# EAGLE board rpi-header-can-pwr_v2 (EAGLE 7.6.0)
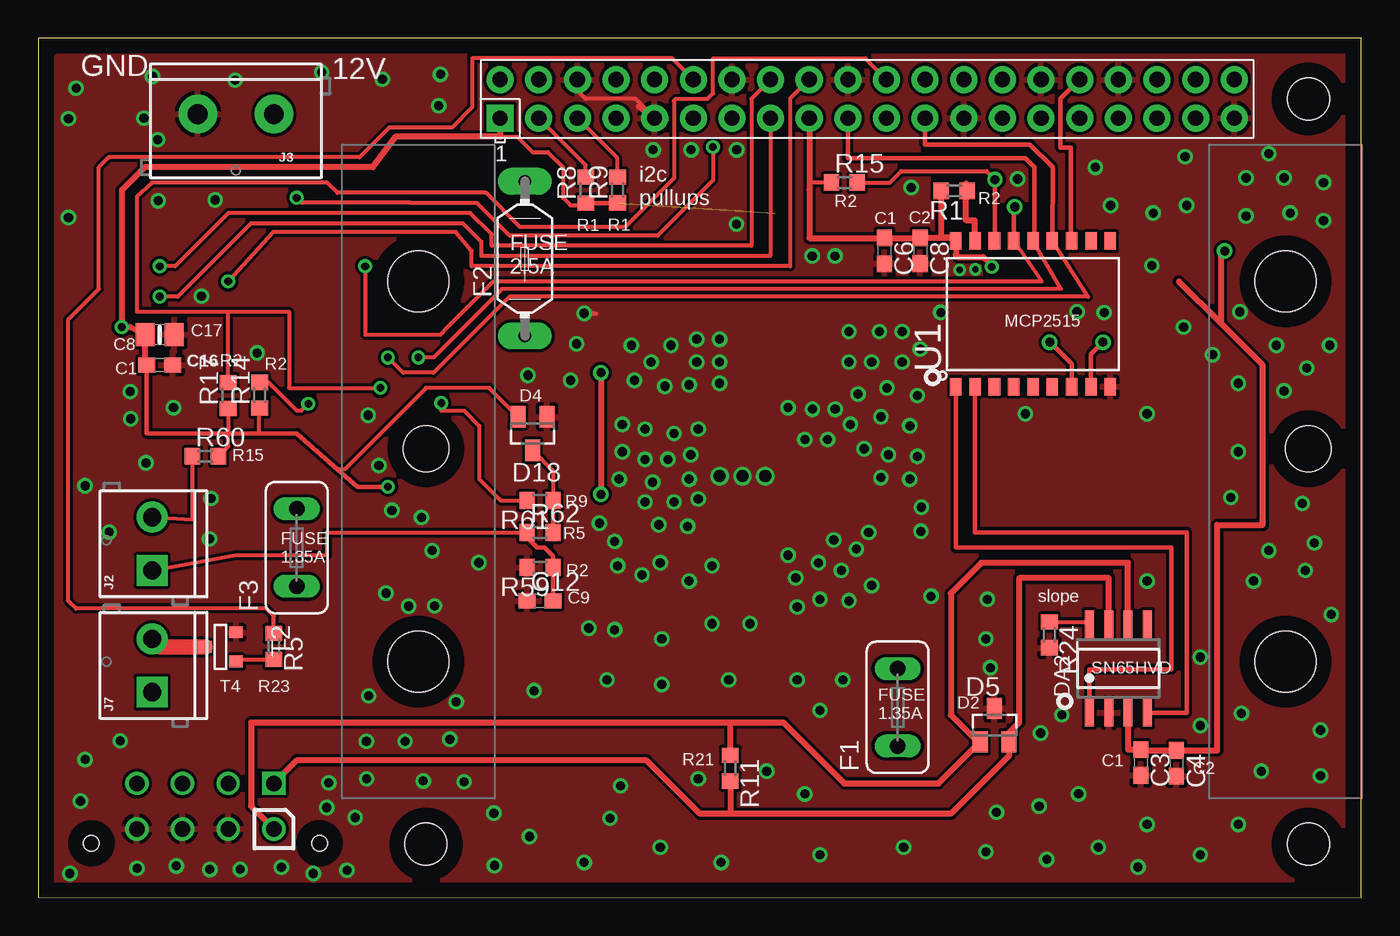
[diagram p0: board, top side]
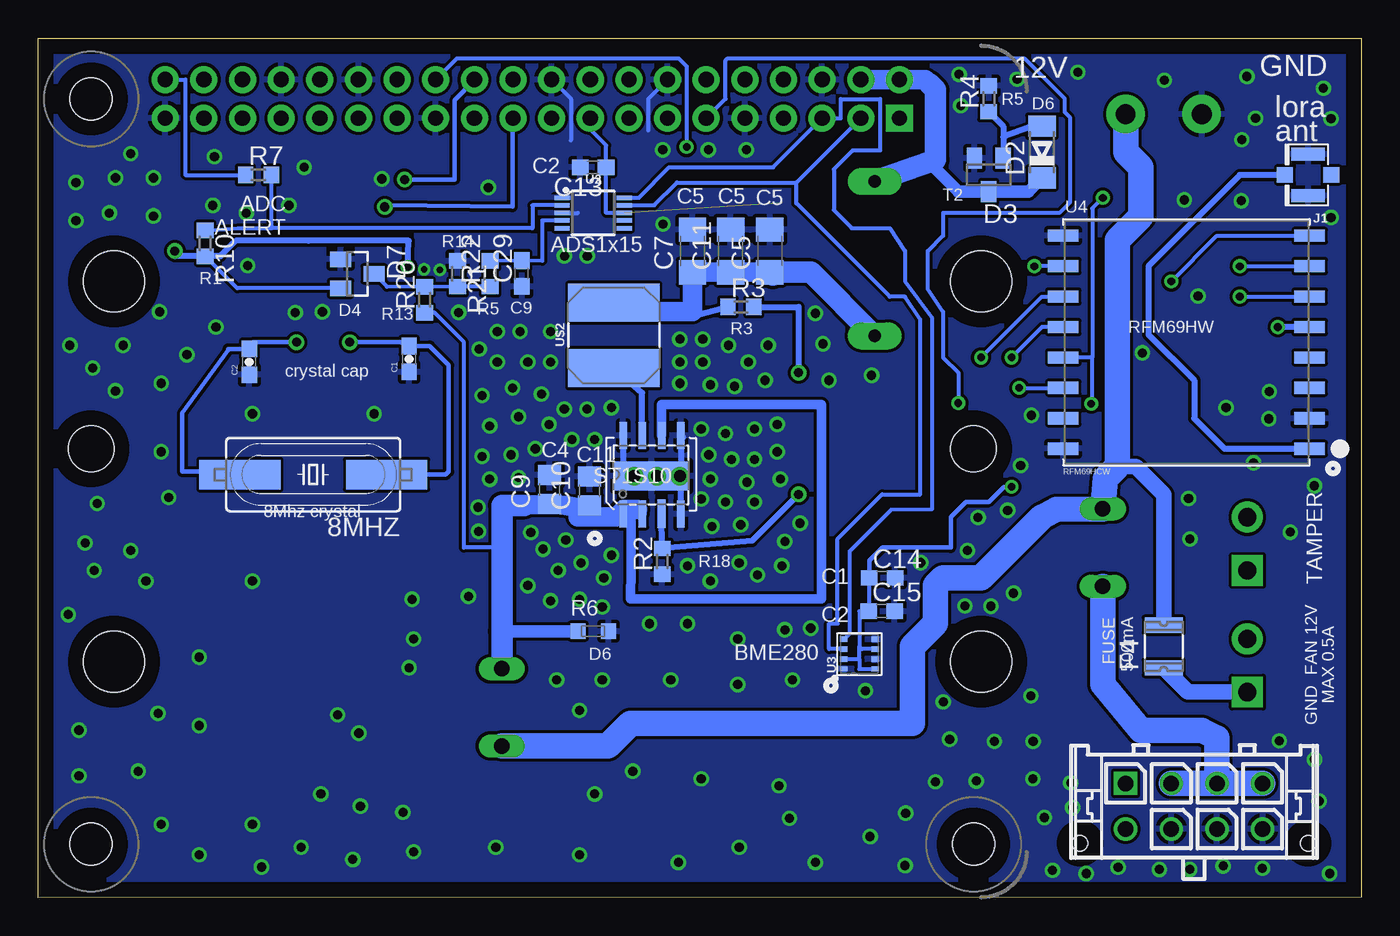
[diagram p1: board, bottom side, seen from below]

Size 86.99 x 56.52 mm. Coordinates in mm from the lower left corner, seen from the top.
Outline: 0,0.02 86.99,0 86.99,56.52 0,56.52 0,0.02
Copper layers (1*16): Top 0.035mm / dielectric 1.5mm / Bottom 0.035mm
Design rules "default *": minimum track width 10mil, minimum drill 0.4mm, track to track 8mil, track to pad 8mil, pad to pad 8mil, via to via 8mil, smd to smd 8mil, copper to edge 40mil, drill to drill 8mil, minimum pad ring 10mil, minimum via ring 8mil, stop-mask expansion 4mil, vias tented up to drill 0mil, thermal gap 10mil
Holes 3 mm at 83.5,29.52 25.5,29.52

## Footprints (pad centres in the part's own frame; a part is rotated, then mirrored left to right if it is on the bottom)
HC49UP = smd 5.334 x 1.93: 1 -4.826,0; 2 4.826,0
0603-CAP = smd 1.1 x 1: 1 -0.85,0; 2 0.85,0
C0603 = smd 1.1 x 1: 1 -0.85,0; 2 0.85,0
C1206 = smd 1.6 x 1.8: 1 -1.4,0; 2 1.4,0
C0805 = smd 1.3 x 1.5: 1 -0.95,0; 2 0.95,0
0603-NO = smd 1.1 x 1: 1 -0.85,0; 2 0.85,0
0805-NO = smd 1.24 x 1.5: 1 -0.95,0; 2 0.95,0
SOD80C = smd 1.4 x 1.8: A 1.7,0; C -1.7,0
SOT23 = smd 1 x 1.4: 1 -0.95,-1.1; 2 0.95,-1.1; 3 0,1.1
SO08 = smd 0.6 x 1.8: 1 -1.905,-2.917; 2 -0.635,-2.917; 3 0.635,-2.917; 4 1.905,-2.917; 5 1.905,2.917; 6 0.635,2.917; 7 -0.635,2.917; 8 -1.905,2.917
TE5 = drill 1.016 long: 1 -2.54,0; 2 2.54,0
LITTLEFUSE = drill 0.813 pad 1.778 long: 1 -5.08,0; 2 5.08,0
1210L = smd 1 x 2.5: 1 -1.4,0; 2 1.4,0
U.FL = smd 2.2 x 0.85: P$1 0,1.375; P$2 0,-1.375 | smd 1.05 x 1: P$3 1.525,0; P$4 -1.525,0
SCREWTERMINAL-3.5MM-2 = drill 1.2 pad 2.032 square: 1 0,0 | drill 1.2 pad 2.032: 2 3.5,0
SCREWTERMINAL-5MM-2 = drill 1.3 pad 2.54: 1 0,0; 2 5,0
R0603 = smd 1 x 1.1: 1 -0.85,0; 2 0.85,0
CT/CN0603 = smd 1 x 1: 1 -1,0; 2 1,0
SOT-23 = smd 0.787 x 0.889: 1 0.025,-1.016; 2 -0.94,1.016; 3 0.991,1.016
SO-18W = smd 0.762 x 1.143: 1 -5.08,-4.788; 2 -3.81,-4.788; 3 -2.54,-4.788; 4 -1.27,-4.788; 5 0,-4.788; 6 1.27,-4.788; 7 2.54,-4.788; 8 3.81,-4.788; 9 5.08,-4.788; 10 5.08,4.788; 11 3.81,4.788; 12 2.54,4.788; 13 1.27,4.788; 14 0,4.788; 15 -1.27,4.788; 16 -2.54,4.788; 17 -3.81,4.788; 18 -5.08,4.788
MSOP10 = smd 0.3 x 1: 1 -1,-2.05; 2 -0.5,-2.05; 3 0,-2.05; 4 0.5,-2.05; 5 1,-2.05; 6 1,2.05; 7 0.5,2.05; 8 0,2.05; 9 -0.5,2.05; 10 -1,2.05
LGA-8-2.5X2.5 = smd 0.35 x 0.5: 1 -0.975,1.025; 2 -0.325,1.025; 3 0.325,1.025; 4 0.975,1.025; 5 0.975,-1.025; 6 0.325,-1.025; 7 -0.325,-1.025; 8 -0.975,-1.025
RFMHCW_SMT = smd 2 x 0.8: 1P 8.1,-7; 2P 8.1,-5; 3P 8.1,-3; 4P 8.1,-1; 5P 8.1,1; 6P 8.1,3; 7P 8.1,5; 8P 8.1,7; 9P -8.1,7; 10P -8.1,5; 11P -8.1,3; 12P -8.1,1; 13P -8.1,-1; 14P -8.1,-3; 15P -8.1,-5; 16P -8.1,-7
POWERSO-8 = smd 0.5 x 1.77: 1 -1.879,-2.5; 2 -0.625,-2.5; 4 1.913,-2.5; 5 1.918,2.65; 6 0.649,2.65; 7 -0.626,2.65; 8 -1.879,2.65 | smd 0.5 x 1.87: 3 0.644,-2.5 | smd 4.953 x 1.905: 9 0,0
0504 = smd 2.5 x 6: 1 -2.175,0; 2 2.125,0
C45-DIN-MOUNT-2-HOLE = hole 4: 0,12.5; 0,-12.5
RASPI_BOARD_B+_EDGES_3DRILL = drill 1 pad 1.778 square: 1 8.37,51.23 | drill 1 pad 1.778: 2 8.37,53.77; 3 10.91,51.23; 4 10.91,53.77; 5 13.45,51.23; 6 13.45,53.77; 7 15.99,51.23; 8 15.99,53.77; 9 18.53,51.23; 10 18.53,53.77; 11 21.07,51.23; 12 21.07,53.77; 13 23.61,51.23; 14 23.61,53.77; 15 26.15,51.23; 16 26.15,53.77; 17 28.69,51.23; 18 28.69,53.77; 19 31.23,51.23; 20 31.23,53.77; 21 33.77,51.23; 22 33.77,53.77; 23 36.31,51.23; 24 36.31,53.77; 25 38.85,51.23; 26 38.85,53.77; 27 41.39,51.23; 28 41.39,53.77; 29 43.93,51.23; 30 43.93,53.77; 31 46.47,51.23; 32 46.47,53.77; 33 49.01,51.23; 34 49.01,53.77; 35 51.55,51.23; 36 51.55,53.77; 37 54.09,51.23; 38 54.09,53.77; 39 56.63,51.23; 40 56.63,53.77 | hole 2.75: 3.5,3.5; 61.5,3.5; 61.5,52.5
43045-0812 = drill 1.02 square: P$1 4.5,0 | drill 1.02: P$2 1.5,0; P$3 -1.5,0; P$4 -4.5,0; P$5 4.5,3; P$6 1.5,3; P$7 -1.5,3; P$8 -4.5,3 | hole 1.02: 7.5,3.94; -7.5,3.94

## Placement (x,y rotation side)
8MHZ  [HC49UP]  68.9,27.82 180 bottom
C1  22pF  [0603-CAP]  62.6,35.42 90 bottom
C2  22pF  [0603-CAP]  73.1,35.23 90 bottom
C3  100n  [C0603]  72.48,8.89 270 top
C4  1u  [C0603]  74.83,8.84 270 top
C5  22uF  [C1206]  38.89,42.52 90 bottom
C6  1u  [C0603]  55.63,42.53 270 top
C7  22uF  [C1206]  43.97,42.52 90 bottom
C8  100n  [C0603]  57.98,42.54 270 top
C9  4,7u  [C0805]  53.37,26.84 90 bottom
C10  100n  [C0805]  50.73,26.74 90 bottom
C11  22uF  [C1206]  41.47,42.52 90 bottom
C12  10nF  [C0603]  33,19.52 0 top
C13  100n  [C0603]  50.5,48.02 180 bottom
C14  1u  [C0603]  31.5,21.02 0 bottom
C15  100n  [C0603]  31.54,18.84 0 bottom
C16  0.1uF  [0603-NO]  8,35.02 0 top
C17  10uF  [0805-NO]  8,37.02 0 top
C29  10nF  [C0603]  55.19,41.04 90 bottom
D2  [SOD80C]  21,49.02 90 bottom
D3  BC846  [SOT23]  24.5,47.52 180 bottom
D5  PESD1CAN  [SOT23]  62.87,11.35 0 top
D7  BAS70-04  [SOT23]  66,41.02 270 bottom
D18  BAS70-04  [SOT23]  32.5,30.52 180 top
DA2  SN65HVD232  [SO08]  71.01,15.08 0 top
F1  FUSETE5  [TE5]  56.5,12.52 90 top
F2  FUSELITTLEFUSE  [LITTLEFUSE]  32,42.02 90 top
F3  FUSETE5  [TE5]  17,23.02 90 top
F4  1210L010  [1210L]  13,16.52 90 bottom
J1  U.FL  [U.FL]  3.5,47.52 180 bottom
J2  [SCREWTERMINAL-3.5MM-2]  7.5,21.52 90 top
J3  [SCREWTERMINAL-5MM-2]  15.5,51.52 180 top
J7  [SCREWTERMINAL-3.5MM-2]  7.5,13.52 90 top
R1  10k  [R0603]  60.22,46.47 180 top
R2  19,1K  [R0603]  45.96,22.11 90 bottom
R3  100k  [R0603]  40.8,38.84 0 bottom
R4  1k  [R0603]  24.5,52.52 90 bottom
R5  500  [R0603]  15.5,16.52 270 top
R6  VARISTORCN0603  [CT/CN0603]  50.5,17.52 0 bottom
R7  0  [R0603]  72.5,47.52 0 bottom
R8  4.7K  [R0603]  36,46.52 90 top
R9  4.7K  [R0603]  38.09,46.53 90 top
R10  4.7K  [R0603]  76,43.02 270 bottom
R11  120  [R0603]  45.5,8.52 270 top
R14  10k  [R0603]  14.57,33.04 90 top
R15  10k  [R0603]  53,47.02 0 top
R17  10k  [R0603]  12.5,33.02 90 top
R20  68k  [R0603]  61.58,39.31 90 bottom
R21  20k  [R0603]  59.42,41.02 270 bottom
R22  1k  [R0603]  57.28,41.02 90 bottom
R24  0  [R0603]  66.47,17.29 270 top
R59  10k  [R0603]  33,21.72 180 top
R60  100  [R0603]  11,29.02 0 top
R61  100  [R0603]  33,26.12 180 top
R62  1k  [R0603]  33,24.02 0 top
T2  [SOT-23]  12,16.52 270 top
U1  MCP2515  [SO-18W]  65.4,38.39 0 top
U2  ADS1015  [MSOP10]  50.5,45.02 270 bottom
U3  BME280  [LGA-8-2.5X2.5]  33,16.02 90 bottom
U4  RFM69HCW  [RFMHCW_SMT]  11.5,36.52 0 bottom
U$1  ST1S10  [POWERSO-8]  46.65,27.74 0 bottom
U$2  4,7uH  [0504]  49.15,37 90 bottom
U$3  [C45-DIN-MOUNT-2-HOLE]  82,28.02 0 bottom
U$4  [C45-DIN-MOUNT-2-HOLE]  25,28.02 0 bottom
X2  RASPI_BOARD_B+#_E3  [RASPI_BOARD_B+_EDGES_3DRILL]  22,0.02 0 top
X4  [43045-0812]  11,7.52 180 bottom

## Library data of the parts
8MHZ = crystal; OC_FARNELL: unknown; OC_NEWARK: unknown
C1 C2 = SparkFun-Capacitors; PROD_ID: CAP-07876
C3-C11 C13-C15 R1-R5 R11 R14 R15 R17 R20-R22 R24 R59-R62 = rcl
C12 C29 = eagle-ltspice; SPICEMODEL: NONE; SPICEPREFIX: C
C16 C17 U4 = microbuilder
D2 D5 D7 D18 = diode
D3 = transistor
DA2 = transceiver
F1-F3 = fuse; OC_FARNELL: unknown; OC_NEWARK: unknown
F4 = polyfuse-smd_10; MF: Littelfuse; MPN: 1210L010; OC_FARNELL: 1822206; OC_NEWARK: 18M4781
J1 = SparkFun-Connectors; PROD_ID: CONN-09193; SF_ID: WRL-09144
J2 J7 = SparkFun-Connectors; PROD_ID: CONN-08399
J3 = SparkFun-Connectors; SF_SKU: PRT-08432
R6 = varistor
R7-R10 = resistor
T2 = zetex; MPN: DSS20201L-7; OC_FARNELL: 1710688; OC_NEWARK: 25R4555
U1 = SparkFun-DigitalIC; PROD_ID: IC-09906
U2 = SparkFun-IC-Conversion; PROD_ID: IC-12270
U3 = SparkFun-Sensors; PROD_ID: IC-13090
U$1 U$2 = lcd
U$3 U$4 = mounting
X2 = raspberrypi_bastelstube_v13
X4 = con-molex-micro-fit-3_0

## Nets
5V: D2.C D3.3 F2.2 X2.2 X2.4
12V_REFERENCE4: D7.3 R20.2 R21.2 R22.1
+3V3: C3.1 C4.1 C6.1 C8.1 C13.1 C14.1 C15.1 C16.1 C17.1 D7.2 D18.2 DA2.3 R1.2 R8.1 R9.1 R10.2 R14.1 R15.1 R17.1 R60.2 U1.18 U2.8 U3.2 U3.6 U3.8 U4.5P X2.1 X2.17
+12V: C9.1 C10.1 F1.2 R6.1 R20.1 U$1.1 U$1.2 U$1.6
ADC_ALERT: R7.1 X2.40
ADC_INPUT_1: C29.2 R22.2 U2.4
ASDASD: D18.3 R61.1 R62.2
CAN_CS: R15.2 U1.16 X2.24
CAN_H: D5.2 DA2.7 R11.2 X4.P$1
CAN_INT: U1.12 X2.32
CAN_L: D5.1 DA2.6 R11.1 X4.P$5
CAN_PWR: F3.1 X4.P$2 X4.P$3 X4.P$4
CAN_RX: DA2.4 U1.2
CAN_TX: DA2.1 U1.1
FAN_PWM: R5.1 X2.12
GND: C1.1 C2.1 C3.2 C4.2 C5.2 C6.2 C7.2 C8.2 C9.2 C10.2 C11.2 C12.1 C13.2 C14.2 C15.2 C16.2 C17.2 C29.1 D3.2 D5.3 D7.1 D18.1 DA2.2 J1.P$1 J1.P$2 J3.2 R2.1 R4.2 R6.2 R21.1 R24.2 R59.2 T2.2 U1.9 U2.1 U2.3 U3.1 U3.5 U3.7 U4.2P U4.9P U4.16P U$1.4 U$1.5 U$1.8 U$1.9 X2.6 X2.9 X2.14 X2.20 X2.25 X2.30 X2.34 X2.39 X4.P$6 X4.P$7 X4.P$8
I2C_SCL: R9.2 U2.10 U3.4 X2.5
I2C_SDA: R8.2 U2.9 U3.3 X2.3
LORA_CS: R14.2 U4.13P X2.26
LORA_DIO0: U4.6P X2.15
LORA_DIO1: U4.7P X2.16
LORA_DIO2: U4.8P X2.18
LORA_RST: R17.2 U4.14P X2.22
MISO: U1.15 U4.10P X2.21
MOSI: U1.14 U4.11P X2.19
N$1: R2.2 R3.2 U$1.3
N$2: 8MHZ.2 C2.2 U1.8
N$3: 8MHZ.1 C1.2 U1.7
N$4: D2.A D3.1 R4.1
N$5: J1.P$3 U4.1P
N$7: U$1.7 U$2.1
N$8: C5.1 C7.1 C11.1 F2.1 R3.1 U$2.2
N$9: R7.2 R10.1 U2.2
N$10: J2.2 R60.1
N$11: C12.2 J2.1 R59.1 R62.1
N$12: R5.2 T2.3
N$13: F4.1 J7.1
N$14: J7.2 T2.1
N$17: DA2.8 R24.1
PRE_FUSE_12V: F1.1 F3.2 F4.2 J3.1
RS: R1.1 U1.17
SCK: U1.13 U4.12P X2.23
TAMPER: R61.2 X2.11

## Tracks (layer width: path | path; a pad name or v marks a point on that pad's centre or on a via)
5V
  Bottom 0.61: 24.6,46.42 D3.3
  Bottom 0.813: D3.3 21.9,46.42 D2.C | 24.6,46.42 26.5,46.42 28.44,48.36
  Bottom 1.27: 28.4,53.52 28.67,53.79 X2.2 X2.4
  Bottom 1.422: 28.4,53.52 28,53.12 28,48.52 28.44,48.36 F2.2
12V_REFERENCE4
  Bottom 0.254: R22.1 R21.2 R20.2 64.05,40.17 D7.3
+3V3  (via drill 0.5, 0.6)  (1 unrouted)
  Top 0.254: R15.1 50.7,47.02 50.7,46.52 | R14.1 14.5,32.12 14.5,30.52 | R17.1 12.5,30.52 12.5,29.67 R60.2 | 30.37,50.02 31.5,50.02 32.5,49.02 33.5,49.02 34.5,48.02 34.5,46.02 35,45.52 35.85,45.52 R8.1 | D18.2 29.65,33.52 25.5,33.52 20.15,28.17 19.69,28.17 | 62.5,41.52 62.55,41.47 v62.69,41.47
  Top 0.305: R8.1 R9.1 | C16.1 7.15,30.52 12.5,30.52 14.5,30.52 17,30.52 19.69,28.17 21,27.02 v23,27.02
  Top 0.406: 60.11,43.39 C8.1 C6.1 | 60.11,43.39 U1.18 60.32,42.27 60.46,42.13 62.11,42.13 62.5,41.74 62.5,41.52 | C6.1 56,43.02 | 60.11,43.39 59.37,43.43 R1.2 | X2.17 50.7,46.52 50.7,43.38 C6.1 | DA2.3 71.64,9.74 C3.1 72.48,9.69 C4.1 77.5,9.69 77.5,24.52 80.5,24.52 80.5,35.02 77.75,37.77 | 77.75,37.77 75,40.52 | v78,42.52 77.75,42.52 77.75,37.77 | X2.1 30.37,50.02 23.5,50.02 22,48.02 7,48.02 5.5,46.52 v5.5,37.52 6.05,37.52 C17.1 7.05,35.02 C16.1
  Bottom 0.254: U2.8 49.65,45.02 C13.1 49.65,49.47 50.7,50.52 X2.17 | U3.2 33,15.7 | 33,15.7 33,16.52 | 33,15.7 33,15.04 U3.8 | U3.6 32.83,16.34 arc90 33,16.52 | 33,16.52 33,18.84 C15.1 32.35,18.84 C14.1 | D7.2 73.9,40.07 R10.2
  Bottom 0.305: C14.1 32.35,22.17 31.5,23.02 27,23.02 27,25.02 26,26.02 24.5,26.02 23.5,27.02 v23,27.02
  Bottom 0.406: v78,42.52 78,42.17 R10.2 75.01,42.17 73.99,43.19 69.23,43.19 69.22,43.2 62.62,43.2 v62.69,41.47 | U4.5P v5.5,37.52
+12V
  Bottom 0.254: 56.5,23.02 59,23.02 59,36.52 60.94,38.46 R20.1
  Bottom 0.406: 52.27,25.79 C10.1 | 51.73,25.49 U$1.1 48.5,25.52
  Bottom 0.61: U$1.6 46,32.42 35.5,32.42 35.5,19.66 48.05,19.66 48,21.62 48,25.52 U$1.2
  Bottom 0.813: R6.1 56.5,17.52
  Bottom 1.27: 55.34,25.8 54.84,25.82 C9.1 52.27,25.79 51,25.52 51.5,25.02 49,25.02 48.5,25.52 48,25.52 47.6,25.52
  Bottom 1.422: 55,25.8 55.34,25.8 56.5,25.8 56.5,23.02 56.5,17.52 F1.2
ADC_ALERT
  Bottom 0.254: X2.40 77.31,53.79 77.31,47.52 R7.1
ADC_INPUT_1
  Bottom 0.254: U2.4 53.85,44.52 53.85,41.87 C29.2 R22.2
ASDASD
  Top 0.254: D18.3 33.85,28.07 R61.1
  Top 0.305: R61.1 R62.2
CAN_CS  (via drill 0.6)
  Top 0.254: R15.2 56,47.02 56.75,47.77 62.35,47.77 v62.9,47.22
  Top 0.305: U1.16 62.9,43.18 v62.9,47.22
  Bottom 0.305: X2.24 59.6,52.42 59.6,47.22 v62.9,47.22
CAN_H
  Top 0.406: DA2.7 70.38,21.02 64.5,21.02 64.5,11.52 63.82,10.84 D5.2 63.82,9.34 60,5.52 45.5,5.52 | 45.5,5.52 43.5,5.52 40,9.02 17,9.02 X4.P$1 | R11.2 45.5,5.52
CAN_INT
  Top 0.305: U1.12 67.9,43.18 67.9,49.32 67.2,49.32 67.2,52.52 X2.32
CAN_L
  Top 0.406: DA2.6 71.64,22.02 62,22.02 60,20.02 60,12.02 61.77,10.25 D5.1 59.19,7.52 53,7.52 49,11.52 45.5,11.52 | 45.5,11.52 14,11.52 14,6.02 X4.P$5 | R11.1 45.5,11.52
CAN_PWR
  Bottom 1.676: X4.P$4 X4.P$3 | X4.P$3 10,7.52 | 10,7.52 X4.P$2 | 9.5,8.02 10,7.52 | F3.1 17,14.02 14.5,11.02 10.5,11.02 9.5,10.52 X4.P$3
CAN_RX
  Top 0.305: DA2.4 75.5,12.16 75.5,24.02 61.59,24.02 U1.2
CAN_TX
  Top 0.305: U1.1 60.32,23.02 74.5,23.02 74.5,15.02 69.11,15.02 DA2.1
  Top 0.406: 69.11,13.12 DA2.1
FAN_PWM
  Top 0.254: X2.12 41.68,55.18 28.54,55.18 28.54,51.98 27.2,50.64 23.09,50.64 21.13,48.68 4.66,48.68 4,48.02 4,40.02 2,38.02 2,19.52 2.5,19.02 15,19.02 15.5,18.52 R5.1
GND  (via drill 0.4, 0.6, 0.8)
  Top 0.254: X2.9 39.26,52.52 36,52.52 35.45,53.07 X2.6
  Top 0.305: v35.9,38.42 36.67,38.42
  Top 0.406: X2.9 39.5,52.02
  Bottom 0.254: U2.3 51.5,45.02 | U2.1 52,46.02 | X2.20 51.96,52.52 51.96,49.8 | X2.14 46.89,52.51 46.89,50.45
  Bottom 0.406: U$1.8 48.53,27.74 U$1.9 | U$1.9 44.73,27.74 U$1.5 44.59,30.28 | U$1.4 44.74,27.74 U$1.9
  other vias: 26.45,54.13 29.96,5.56 21.7,31.72 2,44.72 80.9,48.92 11.27,23.59 75.5,45.52 84.5,47.02 70.5,45.52 69.5,48.02 83.9,23.32 45.91,44.28 41,17.02 39.7,21.22 36.2,17.72 84.3,11.02 32.3,4.02 26.07,19.18 37.6,5.22 39.9,26.02 35,34.02 40.43,49.17 64.39,47.26 27.07,10.42 54.8,20.52 26.34,52.07 28,7.62 25.9,22.82 37.9,23.42 40.4,27.32 21.6,7.82 21.58,10.28 42.8,33.72 8.9,32.22 18.64,54.27 7.53,53.99 46.3,27.72 44.8,27.72 42.9,29.12 51.9,30.12 49.3,32.22 44.8,33.82 41.2,33.62 39.2,34.02 47.8,27.72 42.7,24.42 43.4,26.22 6.09,31.49 41.6,36.32 39,36.32 84.3,8.02 69.7,3.32 58.7,19.82 41.4,28.82 39.9,30.82 43.4,30.82 38.4,31.12 38.2,27.52 40.8,24.52 36.9,24.62 38.1,21.82 40.9,22.02 42.8,20.82 75.4,48.72 62.4,19.62 57.99,36.07 41.8,26.02 42.8,27.52 41.8,30.52 49.3,22.52 49.8,21.02 51.3,22.02 52.3,23.52 52.8,21.52 53.8,22.92 50.4,30.12 50.9,32.12 52.4,32.12 53.4,31.12 53.9,33.12 55.4,31.62 55.9,29.12 55.4,27.62 51.4,19.62 49.9,19.12 37.9,17.62 39.9,28.82 38.4,29.32 44.3,21.82 62.3,17.02 57.3,27.52 57.3,31.02 54.3,29.52 55.8,33.52 40.3,35.22 43.3,36.72 44.8,36.72 44.8,35.22 43.3,35.22 53.3,37.22 55.3,37.22 56.8,37.22 56.8,35.22 54.8,35.22 53.3,35.22 57.8,33.02 46.8,18.02 53.3,19.52 44.3,18.02 58.03,24.09 57.8,29.02 79.1,12.12 83.3,21.52 83.1,25.92 72.3,2.02 62.3,3.02 77.2,35.7 68.3,38.52 75.3,37.52 73.3,45.02 82.3,45.02 58.06,25.67 54.6,24.02 62.6,15.12 11.36,26.25 32.2,34.35 22.4,28.42 22.87,20.02 25.32,7.68 66.3,2.52 65.8,6.02 67.3,12.02 2,51.22 6.06,33.28 25.2,25 7.9,45.82 11.64,45.88 7.86,49.84 10.74,39.56 44.9,2.32 40.9,3.32 51.4,2.82 47.9,8.32 43.4,7.82 56.9,3.32 35.9,2.32 37.4,14.32 21.73,13.27 24.13,10.28 32.61,13.61 45.4,14.32 49.9,14.32 52.9,14.32 6.51,1.94 11.29,1.86 20.84,5.27 28.97,22.03 5.4,10.32 4.68,24.04 24.36,19.17 14.4,35.82 27.49,12.88 79.9,20.82 80.9,22.82 76.4,2.82 78.9,4.82 80.4,8.32 79.4,47.32 81.9,47.32 79.4,44.82 73.21,41.56 83.4,34.82 84.9,36.32 81.4,36.32 81.9,33.32 72.9,31.82 57.39,46.69 64.9,31.82 78.9,33.82 78.9,29.32 72.9,20.82 78.4,26.32 51.4,12.32 50.4,6.82 68.4,6.82 72.9,4.82 65.9,10.82 76.4,11.32 76.4,15.82 22.63,53.81 23.26,25.47 41,14.02 2.5,53.22 30,2.12 63,5.62 85,18.62 84.5,44.52 79,38.52 35.4,36.42 3.09,27.09 3.09,9.09 2.09,1.59 20.31,1.81 19.11,7.55 18.98,5.93 9.09,2.09 18.09,1.59 7.09,28.59 2.79,6.36 13.29,1.86 38.29,7.36 16,2 50.89,42.19 52.39,42.19 70.08,38.47 59.34,38.48 61.61,41.31 60.58,41.28 42.93,49.17 45.93,49.17 6.96,51.25 12.96,53.75
  pour Top: 0,51.02 0,0.72 arc90 1.2,0.02 84,0.02 arc90 87,3.02 87,53.52 arc90 84,56.52 3.5,56.52 arc90
  pour Bottom: 0,53.02 0,2.72 arc90 1.2,0.02 84,0.02 arc90 87,3.02 87,53.52 arc90 84,56.52 3,56.52 arc90
I2C_SCL
  Top 0.254: R9.2 38.09,48.61 X2.5
  Bottom 0.254: U2.10 47.5,46.02 45.5,48.02 38.68,48.02 X2.5 34.23,51.25 34.23,52.51 31.64,52.51 31.64,49.13 33.45,49.13 34.69,47.89 34.69,45.21 33.5,44.02 31,44.02 30,42.52 30,40.52 28.21,38.07 28.21,25.57 30.9,25.52 33.63,22.79 33.63,17.39 U3.4
I2C_SDA
  Top 0.254: R8.2 36,48.16 X2.3
  Bottom 0.254: 37.14,47.02 X2.3 | U2.9 46.5,45.52 45,47.02 37.14,47.02 | U3.3 35,16.34 35,18.02 34.44,18.02 34.44,23.59 31.51,26.52 29,26.52 29,38.02 30,39.52 31,39.52 37.14,45.66 37.14,47.02
LORA_CS  (via drill 0.5)
  Top 0.254: v44.36,49.36 44.36,47.16 40.72,43.52 31,43.52 28.85,45.67 24.5,45.67 24.48,45.69 17.33,45.69 v17,46.02 | R14.2 15.13,33.89 17,32.02 17.3,32.02 v17.76,32.48
  Bottom 0.254: X2.26 59.45,55.19 44.89,55.19 44.36,54.66 v44.36,49.36 | v17,46.02 17.69,45.33 17.69,35.52 | 17.69,35.52 U4.13P | v17.76,32.48 17.69,32.55 17.69,35.52
LORA_DIO0  (via drill 0.5)
  Top 0.254: X2.15 48.14,42.2 29.12,42.2 29.12,43.14 27.94,44.33 13.99,44.33 9.18,39.52 v8,39.52
  Bottom 0.254: v8,39.52 U4.6P
LORA_DIO1  (via drill 0.5)
  Top 0.254: X2.16 46.89,52.53 46.89,42.87 29.82,42.87 29.82,43.61 28.41,45.02 12.5,45.02 9,41.52 v8,41.52
  Bottom 0.254: v8,41.52 U4.7P
LORA_DIO2  (via drill 0.5)
  Top 0.254: X2.18 49.44,52.54 49.44,41.52 28.5,41.52 28.5,42.52 27.46,43.77 15.46,43.77 v12.5,40.52
  Bottom 0.254: v12.5,40.52 9.5,43.52 U4.8P
LORA_RST  (via drill 0.5)
  Top 0.254: X2.22 54.4,55.16 44.37,55.16 44.37,52.89 44,52.52 41.92,52.52 41.79,52.39 41.79,47.31 38.58,44.1 31.68,44.1 29.44,46.34 19.68,46.34 19,47.02 7.5,47.02 6.5,46.09 6.5,38.52 12.5,38.52 | v22.5,33.52 16.5,33.52 16.5,38.52 12.5,38.52 | R17.2 12.5,38.52
  Bottom 0.254: v22.5,33.52 U4.14P
MISO  (via drill 0.5, 0.6)
  Top 0.254: U1.15 65.97,40.52 29.92,40.52 26.96,37.56 26.46,37.02 21.5,37.02 v21.5,41.52
  Top 0.305: U1.15 64.13,45.42 v64.2,45.42
  Bottom 0.254: U4.10P v21.5,41.52
  Bottom 0.305: v64.2,45.42 64.2,45.52 55.8,45.42 55.8,51.05 X2.21
MOSI  (via drill 0.5)
  Top 0.254: U1.14 67.24,40.02 30.5,40.02 26,35.52 v25,35.52
  Top 0.305: U1.14 65.5,43.18 65.5,48.02 64.9,48.62 53.23,48.62 X2.19
  Bottom 0.254: v25,35.52 21,39.52 U4.11P
N$1  (via drill 0.6)
  Top 0.406: v37,34.52 v37,26.52
  Bottom 0.406: U$1.3 R2.2 40.05,23.46 v37,26.52 | R3.2 37,38.84 v37,34.52
N$2  (via drill 0.6)
  Top 0.305: U1.8 69.21,35.73 v70,36.52
  Bottom 0.305: v70,36.52 72.84,36.52 C2.2 74.5,36.08 74.5,36.02 77.5,31.86 77.5,28.02 73.93,28.02 8MHZ.2
N$3  (via drill 0.6)
  Top 0.305: U1.7 67.94,35.08 v66.5,36.52
  Bottom 0.305: 8MHZ.1 60.2,27.82 60,28.02 60,35.02 61.25,36.27 C1.2 63.15,36.52 v66.5,36.52
N$4
  Bottom 0.406: R4.1 23.55,50.72 23.55,50.02 | 23.55,50.02 D3.1 | D2.A 20.8,51.02 23.55,50.02
N$5
  Bottom 0.406: J1.P$3 8,47.52 14,41.52 14,37.02 11,34.02 11,31.52 9,29.52 U4.1P
N$7
  Bottom 0.406: U$1.7 47.28,33.19 U$2.1
N$8
  Bottom 0.406: 46,38.52 46.1,38.12 U$2.2 | R3.1 43.47,38.34 43.97,38.52
  Bottom 1.27: C5.1 C11.1 C7.1 43.97,38.52 46,38.52
  Bottom 1.422: 38.7,40.93 C5.1 36.18,41.12 F2.1
N$9
  Bottom 0.254: U2.2 54.5,45.52 54.5,44.02 71.65,44.02 | 71.65,44.02 R7.2 | R10.1 73.85,44.02 71.65,44.02
N$10
  Top 0.254: J2.2 10.15,24.87 R60.1
N$11
  Top 0.254: J2.1 13,22.52 19,22.52 19,24.02 R62.1
  Top 0.305: C12.2 R59.1 33.85,22.47 33.3,23.02 32.8,23.02 32.15,23.67 R62.1
N$12
  Top 0.254: T2.3 13.16,15.67 R5.2
N$13
  Bottom 1.016: F4.1 11.4,13.52 J7.1
N$14
  Top 1.016: J7.2 8.03,16.5 T2.1
N$17
  Top 0.254: R24.1 68.96,18.14 arc-90 DA2.8
PRE_FUSE_12V
  Bottom 1.016: F4.2 13,26.52 14.82,28.34 16.06,28.34
  Bottom 1.676: F1.1 49.54,9.98 48.04,11.48 29.5,11.48 29.5,16.52 28,18.02 28,20.52 27.5,21.02 25,21.02 21,25.02 20.04,25.52 F3.2 16.84,27.56 16.06,28.34 16.04,43.23 14.5,44.77 14.5,48.02 15.5,49.02 J3.1
RS
  Top 0.406: U1.17 61.57,43.2 61.57,44.52 61,44.52 61,46.97 R1.1
SCK  (via drill 0.5)
  Top 0.254: U1.13 69.01,39.52 31,39.52 26,34.52 24,34.52 v23,35.52
  Top 0.305: U1.13 66.7,48.02 65.2,49.52 58.31,49.52 X2.23
  Bottom 0.254: U4.12P 21,37.52 v23,35.52
TAMPER  (via drill 0.5)
  Top 0.254: v26.5,32.52 26.5,32.02 28,32.02 29,31.02 29,27.52 30.4,26.12 R61.2
  Bottom 0.254: X2.11 41.79,52.53 41.79,55.06 41.67,55.18 22.16,55.18 19.5,52.52 19.5,51.65 19.18,51.33 19.18,45.7 19.86,45.02 27.5,45.02 27.5,43.52 28.5,42.52 28.5,40.02 27.5,38.52 27.5,35.52 26.5,34.52 v26.5,32.52

## Text on the board
_tsilk: GND | 12V | i2c / pullups | R2 | R2 | R1 | R1 | C1 | C2 | FUSE / 2.5A | MCP2515 | C8 | R2 | R2 | C1 | D4 | R15 | R9 | R5 | FUSE / 1.35A | R2 | C9 | slope | SN65HVD | T4 | R23 | FUSE / 1.35A | D2 | R21 | C1 | C2
_bsilk: 12V | GND | D6 | R5 | lora / ant | C2 | T2 | C5 | C5 | C5 | ADC / ALERT | R14 | ADS1x15 | R1 | C9 | R5 | R13 | D4 | RFM69HW | R3 | crystal cap | C11 | C4 | ST1S10 | 8Mhz crystal | C1 | R18 | TAMPER | C2 | FUSE / 500mA | BME280 | D6 | GND FAN 12V / MAX 0.5A
200bmp: can rpi / header / 2020.11.27 / v1.5